# Altium PCB 9..11..13 filter.PcbDoc (part 2 of 2)
Units mil, origin at the board's own origin, x right, y up, seen from the top; angles counter-clockwise.
Board outline 3897.64 x 3897.64 mil, 2 copper layers (Top Layer, Bottom Layer); 210 components, 8 nets, 564 pads, 1454 vias.
Unrouted connection lines stored in the file: 121.
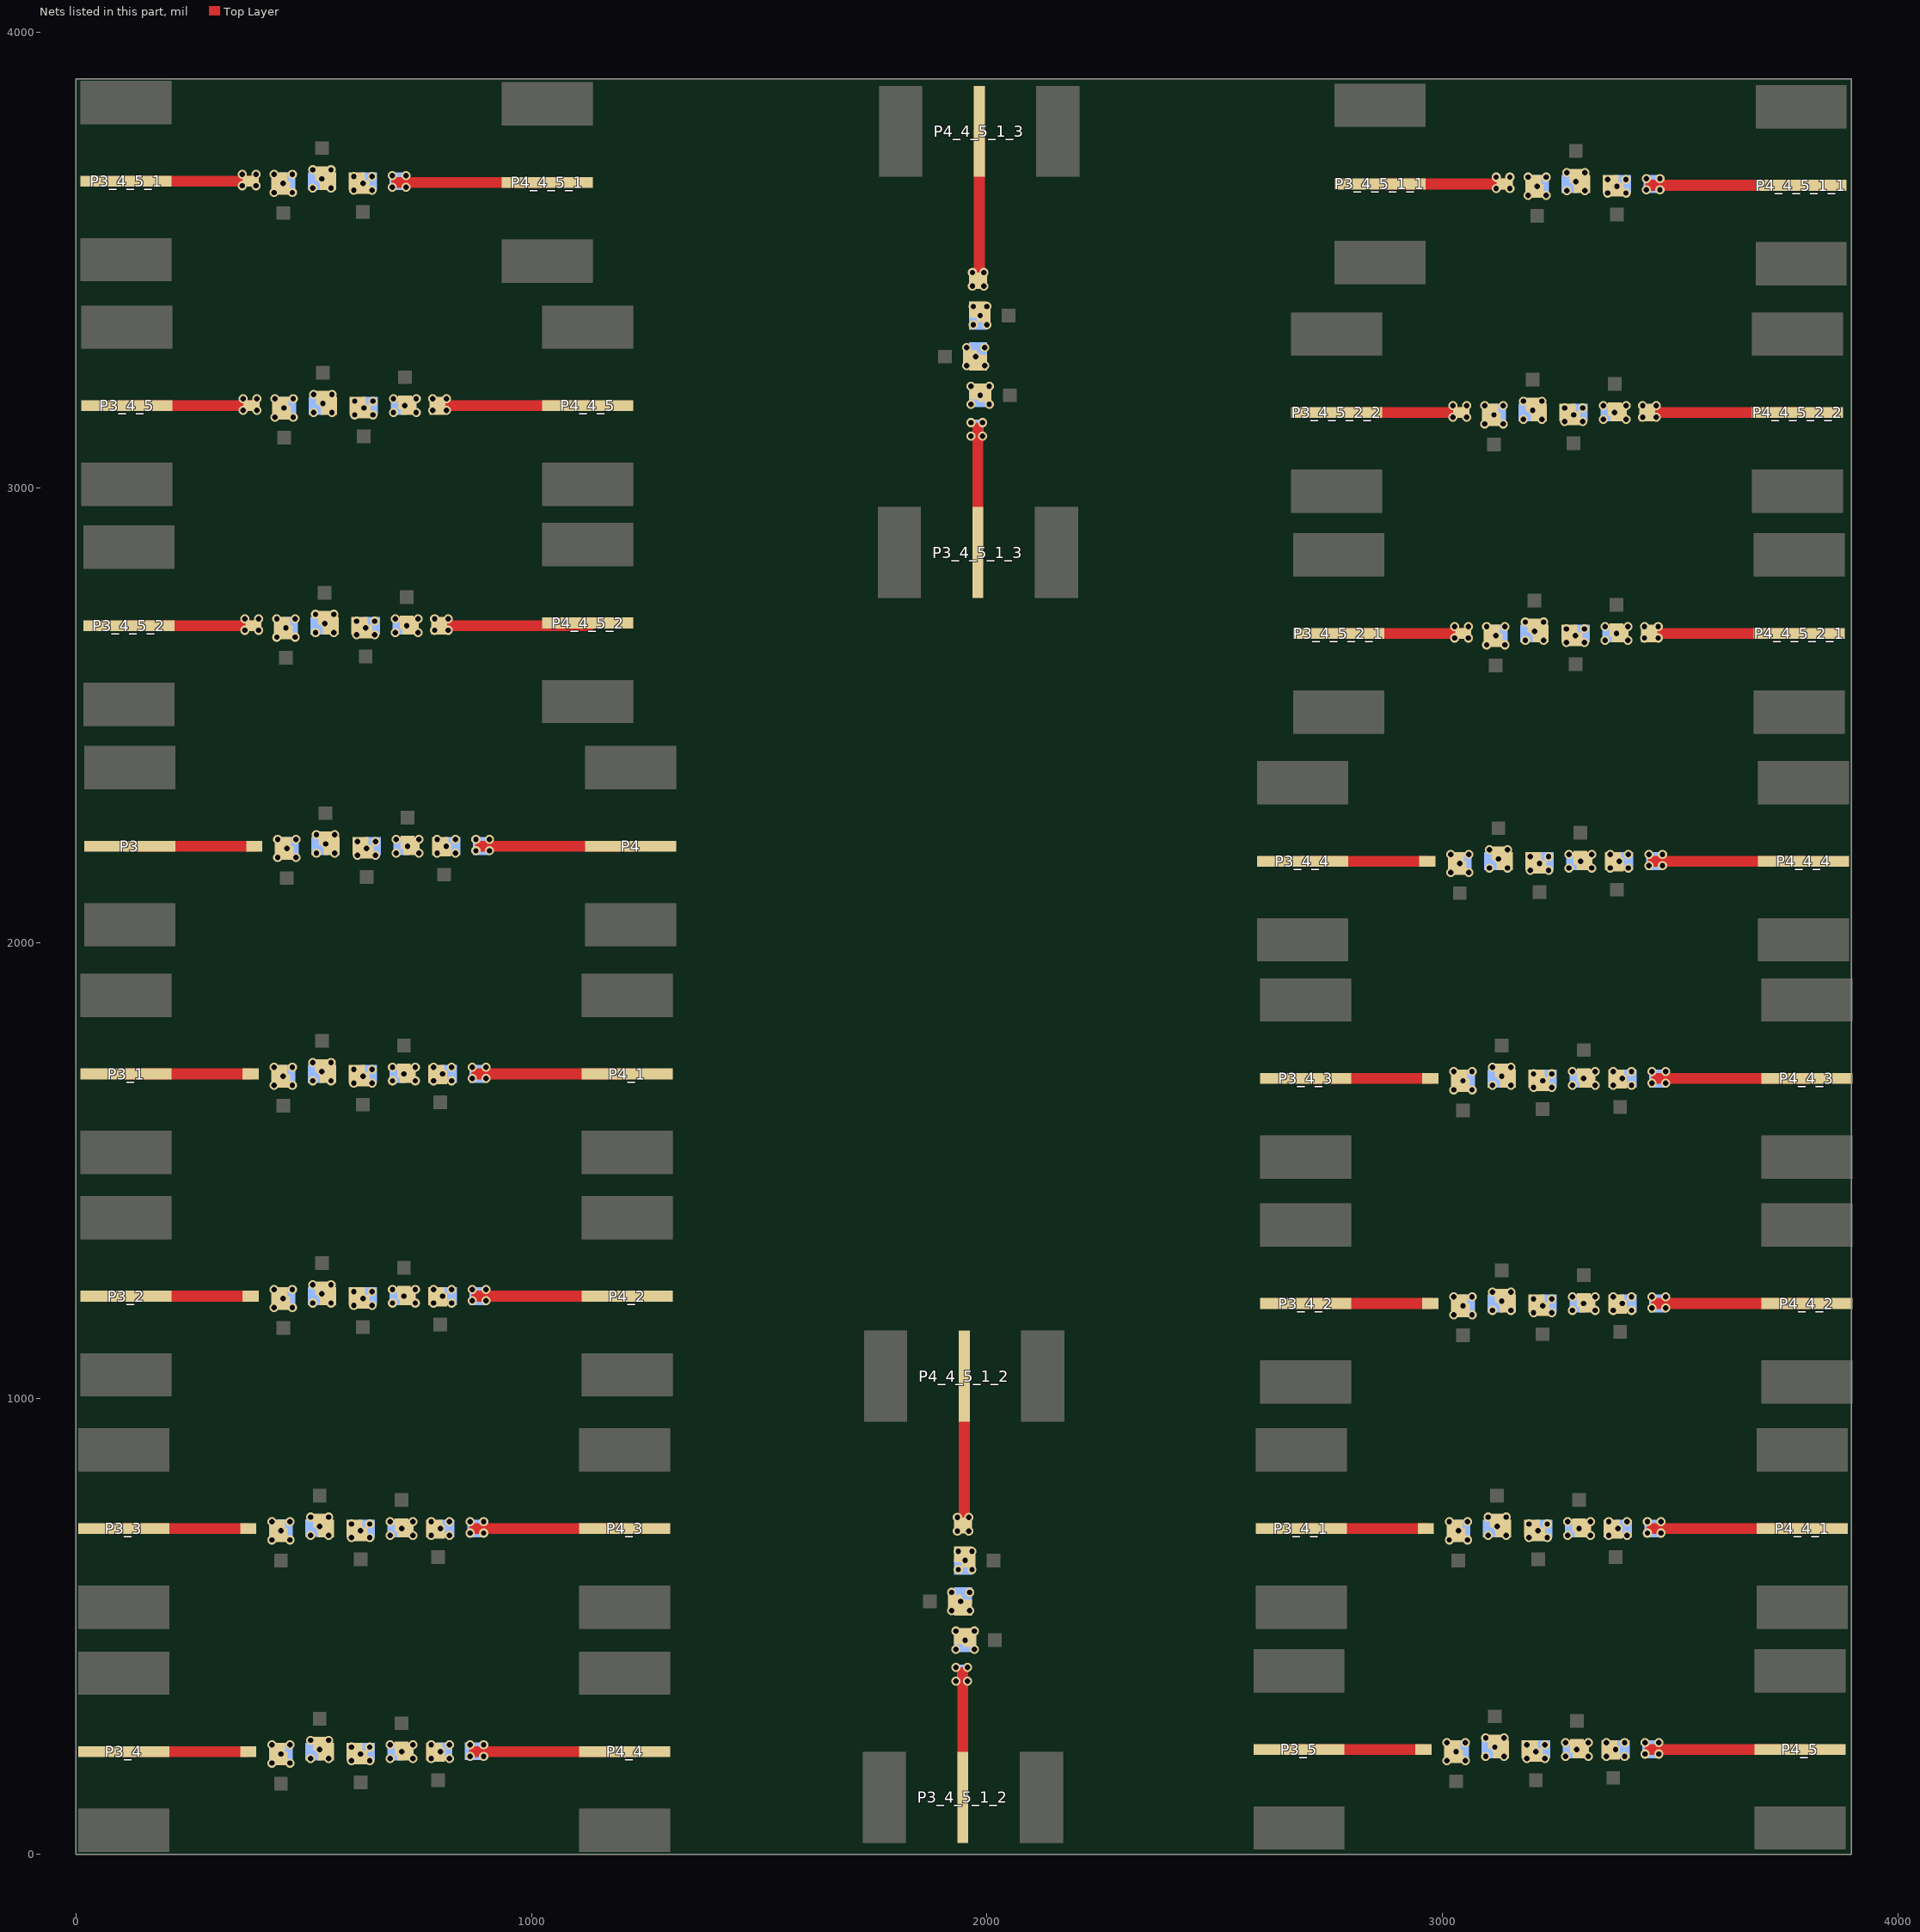
[diagram p2: the nets of this part, all layers, seen from the top]

## Via types
v1: diameter 20, hole 12, Top Layer to Bottom Layer, tented both sides, 1454 vias

## Nets (pads, with @x,y where several pads share a name; then routed paths per layer and width w, separated by ;. In a path a pad name is that pad's centre, name@x,y a point inside that pad or via, vN(x,y) a via of type N, cw(c..) or ccw(c..) an arc to the next point about the centre after c; other vN are vias at no path point) (continued)
NetC20_1: C20.1 C20_1.1 C20_2.1 C20_3.1 C20_4.1 C20_4_1.1 C20_4_2.1 C20_4_3.1 C20_4_4.1 C20_4_5.1 C20_4_5_1.1 C20_4_5_1_1.1 C20_4_5_1_2.1 C20_4_5_1_3.1 C20_4_5_2.1 C20_4_5_2_1.1 C20_4_5_2_2.1 C20_5.1 C23.2 C23_1.2 C23_2.2 C23_3.2 C23_4.2 C23_4_1.2 C23_4_2.2 C23_4_3.2 C23_4_4.2 C23_4_5.2 C23_4_5_1.2 C23_4_5_1_1.2 C23_4_5_1_2.2 C23_4_5_1_3.2 C23_4_5_2.2 C23_4_5_2_1.2 C23_4_5_2_2.2 C23_5.2 L9.2 L9_1.2 L9_2.2 L9_3.2 L9_4.2 L9_4_1.2 L9_4_2.2 L9_4_3.2 L9_4_4.2 L9_4_5.2 L9_4_5_1.2 L9_4_5_1_1.2 L9_4_5_1_2.2 L9_4_5_1_3.2 L9_4_5_2.2 L9_4_5_2_1.2 L9_4_5_2_2.2 L9_5.2
  other v1: 515,210 555,210 3095,215 3135,215 535,230 3115,235 515,250 555,250 3095,255 3135,255 1922.12,534.88 1962.12,534.88 1942.12,554.88 1922.12,574.88 1962.12,574.88 515,700 555,700 3100,700 3140,700 535,720 3120,720 515,740 555,740 3100,740 3140,740 3110,1194 3150,1194 520,1210 560,1210 3130,1214 540,1230 3110,1234 3150,1234 520,1250 560,1250 3110,1688 3150,1688 520,1698 560,1698 3130,1708 540,1718 3110,1728 3150,1728 520,1738 560,1738 3103,2165 3143,2165 3123,2185 528,2198 568,2198 3103,2205 3143,2205 548,2218 528,2238 568,2238 3182,2665 3222,2665 526,2682 566,2682 3202,2685 546,2702 3182,2705 3222,2705 526,2722 566,2722 3178,3150 3218,3150 522,3165 562,3165 3198,3170 542,3185 3178,3190 3218,3190 522,3205 562,3205 1955.12,3267.88 1995.12,3267.88 1975.12,3287.88 1955.12,3307.88 1995.12,3307.88 3272.88,3651.88 3312.88,3651.88 520,3658 560,3658 3292.88,3671.88 540,3678 3272.88,3691.88 3312.88,3691.88 520,3698 560,3698
NetC20_2: C20.2 C20_1.2 C20_2.2 C20_3.2 C20_4.2 C20_4_1.2 C20_4_2.2 C20_4_3.2 C20_4_4.2 C20_4_5.2 C20_4_5_1.2 C20_4_5_1_1.2 C20_4_5_1_2.2 C20_4_5_1_3.2 C20_4_5_2.2 C20_4_5_2_1.2 C20_4_5_2_2.2 C20_5.2 C21.1 C21_1.1 C21_2.1 C21_3.1 C21_4.1 C21_4_1.1 C21_4_2.1 C21_4_3.1 C21_4_4.1 C21_4_5.1 C21_4_5_1.1 C21_4_5_1_1.1 C21_4_5_1_2.1 C21_4_5_1_3.1 C21_4_5_2.1 C21_4_5_2_1.1 C21_4_5_2_2.1 C21_5.1 L10.2 L10_1.2 L10_2.2 L10_3.2 L10_4.2 L10_4_1.2 L10_4_2.2 L10_4_3.2 L10_4_4.2 L10_4_5.2 L10_4_5_1.2 L10_4_5_1_1.2 L10_4_5_1_2.2 L10_4_5_1_3.2 L10_4_5_2.2 L10_4_5_2_1.2 L10_4_5_2_2.2 L10_5.2
  other v1: 605,205 645,205 3185,210 3225,210 625,220 3205,225 605,235 645,235 3185,240 3225,240 1937.12,624.88 1967.12,624.88 1952.12,644.88 1937.12,664.88 1967.12,664.88 605,695 645,695 3190,695 3230,695 625,710 3210,710 605,725 645,725 3190,725 3230,725 3200,1189 3240,1189 3220,1204 610,1205 650,1205 3200,1219 3240,1219 630,1220 610,1235 650,1235 3200,1683 3240,1683 610,1693 650,1693 3220,1698 630,1708 3200,1713 3240,1713 610,1723 650,1723 3193,2160 3233,2160 3213,2175 3193,2190 3233,2190 618,2193 658,2193 638,2208 618,2223 658,2223 3272,2660 3312,2660 3292,2675 616,2677 656,2677 3272,2690 3312,2690 636,2692 616,2707 656,2707 3268,3145 3308,3145 612,3160 652,3160 3288,3160 632,3175 3268,3175 3308,3175 612,3190 652,3190 1970.12,3357.88 2000.12,3357.88 1985.12,3377.88 1970.12,3397.88 2000.12,3397.88 3362.88,3646.88 3402.88,3646.88 610,3653 650,3653 3382.88,3661.88 630,3668 3362.88,3676.88 3402.88,3676.88 610,3683 650,3683
NetC21_2: C21.2 C21_1.2 C21_2.2 C21_3.2 C21_4.2 C21_4_1.2 C21_4_2.2 C21_4_3.2 C21_4_4.2 C21_4_5.2 C21_4_5_1.2 C21_4_5_1_1.2 C21_4_5_1_2.2 C21_4_5_1_3.2 C21_4_5_2.2 C21_4_5_2_1.2 C21_4_5_2_2.2 C21_5.2 C22.1 C22_1.1 C22_2.1 C22_3.1 C22_4.1 C22_4_1.1 C22_4_2.1 C22_4_3.1 C22_4_4.1 C22_4_5.1 C22_4_5_1.1 C22_4_5_1_1.1 C22_4_5_1_2.1 C22_5.1 L11.2 L11_1.2 L11_2.2 L11_3.2 L11_4.2 L11_4_1.2 L11_4_2.2 L11_4_3.2 L11_4_4.2 L11_4_5.2 L11_4_5_1.2 L11_4_5_1_1.2 L11_4_5_1_2.2 L11_5.2
  other v1: 690,210 740,210 3270,215 3320,215 715,225 3295,230 690,240 740,240 3270,245 3320,245 690,700 740,700 3275,700 3325,700 715,715 3300,715 690,730 740,730 3275,730 3325,730 3285,1194 3335,1194 3310,1209 695,1210 745,1210 3285,1224 3335,1224 720,1225 695,1240 745,1240 3285,1688 3335,1688 695,1698 745,1698 3310,1703 720,1713 3285,1718 3335,1718 695,1728 745,1728 3278,2165 3328,2165 3303,2180 3278,2195 3328,2195 703,2198 753,2198 728,2213 703,2228 753,2228 3357,2665 3407,2665 3382,2680 701,2682 751,2682 3357,2695 3407,2695 726,2697 701,2712 751,2712 3353,3150 3403,3150 697,3165 747,3165 3378,3165 722,3180 3353,3180 3403,3180 697,3195 747,3195
NetC22_2: C22.2 C22_1.2 C22_2.2 C22_3.2 C22_4.2 C22_4_1.2 C22_4_2.2 C22_4_3.2 C22_4_4.2 C22_4_5.2 C22_4_5_1.2 C22_4_5_1_1.2 C22_4_5_1_2.2 C22_5.2 C24.1 C24_1.1 C24_2.1 C24_3.1 C24_4.1 C24_4_1.1 C24_4_2.1 C24_4_3.1 C24_4_4.1 C24_5.1 L12.2 L12_1.2 L12_2.2 L12_3.2 L12_4.2 L12_4_1.2 L12_4_2.2 L12_4_3.2 L12_4_4.2 L12_5.2
  other v1: 780,210 820,210 3360,215 3400,215 800,225 3380,230 780,240 820,240 3360,245 3400,245 780,700 820,700 3365,700 3405,700 800,715 3385,715 780,730 820,730 3365,730 3405,730 3375,1194 3415,1194 3395,1209 785,1210 825,1210 3375,1224 3415,1224 805,1225 785,1240 825,1240 3375,1688 3415,1688 785,1698 825,1698 3395,1703 805,1713 3375,1718 3415,1718 785,1728 825,1728 3368,2165 3408,2165 3388,2180 3368,2195 3408,2195 793,2198 833,2198 813,2213 793,2228 833,2228
NetC23_1: C23.1 C23_1.1 C23_2.1 C23_3.1 C23_4.1 C23_4_1.1 C23_4_2.1 C23_4_3.1 C23_4_4.1 C23_4_5.1 C23_4_5_1.1 C23_4_5_1_1.1 C23_4_5_1_2.1 C23_4_5_1_3.1 C23_4_5_2.1 C23_4_5_2_1.1 C23_4_5_2_2.1 C23_5.1 C25.2 C25_1.2 C25_2.2 C25_3.2 C25_4.2 C25_4_1.2 C25_4_2.2 C25_4_3.2 C25_4_4.2 C25_4_5.2 C25_4_5_1.2 C25_4_5_1_1.2 C25_4_5_1_2.2 C25_4_5_1_3.2 C25_4_5_2.2 C25_4_5_2_1.2 C25_4_5_2_2.2 C25_5.2 L13.2 L13_1.2 L13_2.2 L13_3.2 L13_4.2 L13_4_1.2 L13_4_2.2 L13_4_3.2 L13_4_4.2 L13_4_5.2 L13_4_5_1.2 L13_4_5_1_1.2 L13_4_5_1_2.2 L13_4_5_1_3.2 L13_4_5_2.2 L13_4_5_2_1.2 L13_4_5_2_2.2 L13_5.2
  other v1: 430,200 470,200 3010,205 3050,205 450,220 3030,225 430,240 470,240 3010,245 3050,245 1932.12,449.88 1972.12,449.88 1952.12,469.88 1932.12,489.88 1972.12,489.88 430,690 470,690 3015,690 3055,690 450,710 3035,710 430,730 470,730 3015,730 3055,730 3025,1184 3065,1184 435,1200 475,1200 3045,1204 455,1220 3025,1224 3065,1224 435,1240 475,1240 3025,1678 3065,1678 435,1688 475,1688 3045,1698 455,1708 3025,1718 3065,1718 435,1728 475,1728 3018,2155 3058,2155 3038,2175 443,2188 483,2188 3018,2195 3058,2195 463,2208 443,2228 483,2228 3097,2655 3137,2655 441,2672 481,2672 3117,2675 461,2692 3097,2695 3137,2695 441,2712 481,2712 3093,3140 3133,3140 437,3155 477,3155 3113,3160 457,3175 3093,3180 3133,3180 1965.12,3182.88 2005.12,3182.88 437,3195 477,3195 1985.12,3202.88 1965.12,3222.88 2005.12,3222.88 3187.88,3641.88 3227.88,3641.88 435,3648 475,3648 3207.88,3661.88 455,3668 3187.88,3681.88 3227.88,3681.88 435,3688 475,3688
NetC24_2: C24.2 C24_1.2 C24_2.2 C24_3.2 C24_4.2 C24_4_1.2 C24_4_2.2 C24_4_3.2 C24_4_4.2 C24_5.2 P4.1 P4_1.1 P4_2.1 P4_3.1 P4_4.1 P4_4_1.1 P4_4_2.1 P4_4_3.1 P4_4_4.1 P4_4_5.1 P4_4_5_1.1 P4_4_5_1_1.1 P4_4_5_1_2.1 P4_4_5_1_3.1 P4_4_5_2.1 P4_4_5_2_1.1 P4_4_5_2_2.1 P4_5.1 | length 5940
  Top Layer w24: 704.5,3670 P4_4_5_1.1@1034.5,3670 ; 793.5,3180 P4_4_5.1@1123.5,3180 ; 797.5,2697 P4_4_5_2.1@1127.5,2697 ; 875,225 P4_4.1@1205,225 ; 875,715 P4_3.1@1205,715 ; 880,1225 P4_2.1@1210,1225 ; 880,1713 P4_1.1@1210,1713 ; 888,2213 P4.1@1218,2213 ; 1950.12,719.37 P4_4_5_1_2.1@1950.12,1049.37 ; 1983.12,3452.37 P4_4_5_1_3.1@1983.12,3782.37 ; 3449.5,3165 P4_4_5_2_2.1@3779.5,3165 ; 3453.5,2680 P4_4_5_2_1.1@3783.5,2680 ; 3455,230 P4_5.1@3785,230 ; 3457.37,3663.88 P4_4_5_1_1.1@3787.37,3663.88 ; 3460,715 P4_4_1.1@3790,715 ; 3463,2180 P4_4_4.1@3793,2180 ; 3470,1209 P4_4_2.1@3800,1209 ; 3470,1703 P4_4_3.1@3800,1703
  other v1: 865,215 895,215 3445,220 3475,220 865,240 895,240 3445,245 3475,245 865,705 895,705 3450,705 3480,705 1935.12,709.37 1960.12,709.37 865,730 895,730 3450,730 3480,730 1935.12,739.37 1960.12,739.37 3460,1199 3490,1199 870,1215 900,1215 3460,1224 3490,1224 870,1240 900,1240 3460,1693 3490,1693 870,1703 900,1703 3460,1718 3490,1718 870,1728 900,1728 3453,2170 3483,2170 3453,2195 3483,2195 878,2203 908,2203 878,2228 908,2228 3443.5,2670 3473.5,2670 787.5,2687 817.5,2687 3443.5,2695 3473.5,2695 787.5,2712 817.5,2712 3439.5,3155 3469.5,3155 783.5,3170 813.5,3170 3439.5,3180 3469.5,3180 783.5,3195 813.5,3195 1968.12,3442.37 1993.12,3442.37 1968.12,3472.37 1993.12,3472.37 3447.37,3653.88 3477.37,3653.88 694.5,3660 724.5,3660 3447.37,3678.88 3477.37,3678.88 694.5,3685 724.5,3685
NetC25_1: C25.1 C25_1.1 C25_2.1 C25_3.1 C25_4.1 C25_4_1.1 C25_4_2.1 C25_4_3.1 C25_4_4.1 C25_4_5.1 C25_4_5_1.1 C25_4_5_1_1.1 C25_4_5_1_2.1 C25_4_5_1_3.1 C25_4_5_2.1 C25_4_5_2_1.1 C25_4_5_2_2.1 C25_5.1 P3.1 P3_1.1 P3_2.1 P3_3.1 P3_4.1 P3_4_1.1 P3_4_2.1 P3_4_3.1 P3_4_4.1 P3_4_5.1 P3_4_5_1.1 P3_4_5_1_1.1 P3_4_5_1_2.1 P3_4_5_1_3.1 P3_4_5_2.1 P3_4_5_2_1.1 P3_4_5_2_2.1 P3_5.1 | length 4923.1
  Top Layer w24: P3_4.1@105,225 C25_4.1@378.5,225 ; P3_3.1@105,715 C25_3.1@378.5,715 ; P3_2.1@110,1225 C25_2.1@383.5,1225 ; P3_1.1@110,1713 C25_1.1@383.5,1713 ; P3_4_5_1.1@110,3673 C25_4_5_1.1@383.5,3673 ; P3_4_5.1@112,3180 C25_4_5.1@385.5,3180 ; P3_4_5_2.1@116,2697 371,2697 C25_4_5_2.1@389.5,2697 ; P3.1@118,2213 C25.1@391.5,2213 ; P3_4_5_1_2.1@1947.12,124.88 1947.12,398.38 ; P3_4_5_1_3.1@1980.12,2857.88 1980.12,3131.38 ; P3_5.1@2685,230 C25_5.1@2958.5,230 ; P3_4_1.1@2690,715 C25_4_1.1@2963.5,715 ; P3_4_4.1@2693,2180 C25_4_4.1@2966.5,2180 ; P3_4_2.1@2700,1209 C25_4_2.1@2973.5,1209 ; P3_4_3.1@2700,1703 C25_4_3.1@2973.5,1703 ; P3_4_5_2_2.1@2768,3165 C25_4_5_2_2.1@3041.5,3165 ; P3_4_5_2_1.1@2772,2680 C25_4_5_2_1.1@3045.5,2680 ; P3_4_5_1_1.1@2862.88,3666.88 3117.88,3666.88 C25_4_5_1_1.1@3136.38,3666.88
  other v1: 1932.12,379.88 1957.12,379.88 1932.12,409.88 1957.12,409.88 3027,2670 3057,2670 371,2687 401,2687 3027,2695 3057,2695 371,2712 401,2712 1965.12,3112.88 1990.12,3112.88 1965.12,3142.88 1990.12,3142.88 3023,3155 3053,3155 367,3170 397,3170 3023,3180 3053,3180 367,3195 397,3195 3117.88,3656.88 3147.88,3656.88 365,3663 395,3663 3117.88,3681.88 3147.88,3681.88 365,3688 395,3688

## Polygon pours and split planes (outlines as drawn)
GND on Bottom Layer "Bottom Layer-GND" (solid, remove dead copper, pour order 62): 1757.12,2755.88 2200.12,2755.88 ccw(c2200.12,2756.88) 2201.12,2756.88 2201.12,3882.88 cw(c2204.12,3882.88) 2204.12,3885.88 1762.12,3885.88 ccw(c1762.12,3884.88) 1761.12,3884.88
GND on Bottom Layer "Bottom Layer-GND 1" (solid, remove dead copper, pour order 60): 1724.12,22.88 2167.12,22.88 ccw(c2167.12,23.88) 2168.12,23.88 2168.12,1149.88 cw(c2171.12,1149.88) 2171.12,1152.88 1729.12,1152.88 ccw(c1729.12,1151.88) 1728.12,1151.88
GND on Bottom Layer "Bottom Layer-GND 2" (solid, remove dead copper, pour order 58): 2760.88,3889.88 2760.88,3446.88 ccw(c2761.88,3446.88) 2761.88,3445.88 3887.88,3445.88 cw(c3887.88,3442.88) 3890.88,3442.88 3890.88,3884.88 ccw(c3889.88,3884.88) 3889.88,3885.88
GND on Bottom Layer "Top Layer-No Net" (solid, pour order 56): 2668,3384 3878,3384 3881,2944 2668,2944
GND on Bottom Layer "Top Layer-No Net" (solid, pour order 54): 2672,2899 3882,2899 3885,2459 2672,2459
GND on Bottom Layer "Top Layer-No Net" (solid, pour order 52): 16,2916 1226,2916 1229,2476 16,2476
GND on Bottom Layer "Bottom Layer-GND 3" (solid, remove dead copper, pour order 50): 8,3896 8,3453 ccw(c9,3453) 9,3452 1135,3452 cw(c1135,3449) 1138,3449 1138,3891 ccw(c1137,3891) 1137,3892
GND on Bottom Layer "Top Layer-No Net" (solid, pour order 48): 12,3399 1222,3399 1225,2959 12,2959
GND on Bottom Layer "Top Layer-No Net" (solid, pour order 46): 2588,2405 3898,2405 3898,1955 2588,1955
GND on Bottom Layer "Top Layer-No Net" (solid, pour order 44): 2595,1928 3905,1928 3905,1478 2595,1478
GND on Bottom Layer "Top Layer-No Net" (solid, pour order 42): 2595,1434 3905,1434 3905,984 2595,984
GND on Bottom Layer "Top Layer-No Net" (solid, pour order 40): 2585,940 3895,940 3895,490 2585,490
GND on Bottom Layer "Top Layer-No Net" (solid, pour order 30): 2580,455 3890,455 3890,5 2580,5
GND on Bottom Layer "Top Layer-No Net" (solid, pour order 28): 0,450 1310,450 1310,0 0,0
GND on Bottom Layer "Top Layer-No Net" (solid, pour order 26): 0,940 1310,940 1310,490 0,490
GND on Bottom Layer "Top Layer-No Net" (solid, pour order 24): 5,1450 1315,1450 1315,1000 5,1000
GND on Bottom Layer "Top Layer-No Net" (solid, pour order 22): 5,1938 1315,1938 1315,1488 5,1488
GND on Bottom Layer "Top Layer-No Net" (solid, pour order 0): 13,2438 1323,2438 1323,1988 13,1988

## Keep-outs
Keep-Out Layer:
  the board outline again, w10

## Other copper
Top Layer:
  region net NetC25_1: 2000.12,3102.88 2000.12,3152.88 1955.12,3152.88 1955.12,3102.88
  region net GND: 2075.12,3352.88 2075.12,3402.88 2035.12,3402.88 2035.12,3352.88
  region net GND: 1920.12,3267.88 1920.12,3307.88 1885.12,3307.88 1885.12,3267.88
  region net GND: 2070.12,3182.88 2070.12,3222.88 2035.12,3222.88 2035.12,3182.88
  region net NetC20_2: 2010.12,3347.88 2010.12,3407.88 1960.12,3407.88 1960.12,3347.88
  region: 2005.12,3257.88 2005.12,3317.88 1945.12,3317.88 1945.12,3257.88
  region net NetC23_1: 2015.12,3172.88 2015.12,3232.88 1955.12,3232.88 1955.12,3172.88
  region net NetC24_2: 2003.12,3432.37 2003.12,3482.37 1958.12,3482.37 1958.12,3432.37
  region net NetC25_1: 1967.12,369.88 1967.12,419.88 1922.12,419.88 1922.12,369.88
  region net GND: 2042.12,619.88 2042.12,669.88 2002.12,669.88 2002.12,619.88
  region net GND: 1887.12,534.88 1887.12,574.88 1852.12,574.88 1852.12,534.88
  region net GND: 2037.12,449.88 2037.12,489.88 2002.12,489.88 2002.12,449.88
  region net NetC20_2: 1977.12,614.88 1977.12,674.88 1927.12,674.88 1927.12,614.88
  region: 1972.12,524.88 1972.12,584.88 1912.12,584.88 1912.12,524.88
  region net NetC23_1: 1982.12,439.88 1982.12,499.88 1922.12,499.88 1922.12,439.88
  region net NetC24_2: 1970.12,699.37 1970.12,749.37 1925.12,749.37 1925.12,699.37
  rectangle net NetC25_1: 3107.88,3646.88 3157.88,3691.88
  rectangle net GND: 3357.88,3571.88 3407.88,3611.88
  rectangle net GND: 3272.88,3726.88 3312.88,3761.88
  rectangle net GND: 3187.88,3576.88 3227.88,3611.88
  rectangle net NetC20_2: 3352.88,3636.88 3412.88,3686.88
  rectangle: 3262.88,3641.88 3322.88,3701.88
  rectangle net NetC23_1: 3177.88,3631.88 3237.88,3691.88
  rectangle net NetC24_2: 3437.37,3643.88 3487.37,3688.88
  rectangle net NetC25_1: 3013,3145 3063,3190
  rectangle net GND: 3353,3215 3403,3255
  rectangle net GND: 3263,3070 3313,3110
  rectangle net GND: 3178,3225 3218,3260
  rectangle net GND: 3093,3075 3133,3110
  rectangle net NetC21_2: 3343,3140 3408,3190
  rectangle net NetC20_2: 3258,3135 3318,3185
  rectangle: 3168,3140 3228,3200
  rectangle net NetC23_1: 3083,3130 3143,3190
  rectangle net NetC24_2: 3429.5,3145 3479.5,3190
  rectangle net NetC25_1: 3017,2660 3067,2705
  rectangle net GND: 3357,2730 3407,2770
  rectangle net GND: 3267,2585 3317,2625
  rectangle net GND: 3182,2740 3222,2775
  rectangle net GND: 3097,2590 3137,2625
  rectangle net NetC21_2: 3347,2655 3412,2705
  rectangle net NetC20_2: 3262,2650 3322,2700
  rectangle: 3172,2655 3232,2715
  rectangle net NetC23_1: 3087,2645 3147,2705
  rectangle net NetC24_2: 3433.5,2660 3483.5,2705
  rectangle net NetC24_2: 777.5,2677 827.5,2722
  rectangle net NetC23_1: 431,2662 491,2722
  rectangle: 516,2672 576,2732
  rectangle net NetC20_2: 606,2667 666,2717
  rectangle net NetC21_2: 691,2672 756,2722
  rectangle net GND: 441,2607 481,2642
  rectangle net GND: 526,2757 566,2792
  rectangle net GND: 611,2602 661,2642
  rectangle net GND: 701,2747 751,2787
  rectangle net NetC25_1: 361,2677 411,2722
  rectangle net NetC24_2: 684.5,3650 734.5,3695
  rectangle net NetC23_1: 425,3638 485,3698
  rectangle: 510,3648 570,3708
  rectangle net NetC20_2: 600,3643 660,3693
  rectangle net GND: 435,3583 475,3618
  rectangle net GND: 520,3733 560,3768
  rectangle net GND: 605,3578 655,3618
  rectangle net NetC25_1: 355,3653 405,3698
  rectangle net NetC25_1: 357,3160 407,3205
  rectangle net GND: 697,3230 747,3270
  rectangle net GND: 607,3085 657,3125
  rectangle net GND: 522,3240 562,3275
  rectangle net GND: 437,3090 477,3125
  rectangle net NetC21_2: 687,3155 752,3205
  rectangle net NetC20_2: 602,3150 662,3200
  rectangle: 512,3155 572,3215
  rectangle net NetC23_1: 427,3145 487,3205
  rectangle net NetC24_2: 773.5,3160 823.5,3205
  rectangle net GND: 3363,2090 3403,2130
  rectangle net GND: 3278,2230 3328,2270
  rectangle net GND: 3188,2085 3238,2125
  rectangle net GND: 3103,2240 3143,2275
  rectangle net GND: 3018,2090 3058,2125
  rectangle net NetC22_2: 3353,2155 3423,2205
  rectangle net NetC21_2: 3268,2155 3333,2205
  rectangle net NetC20_2: 3183,2150 3243,2200
  rectangle: 3093,2155 3153,2215
  rectangle net NetC23_1: 3008,2145 3068,2205
  rectangle net NetC24_2: 3443,2160 3493,2205
  rectangle net GND: 3370,1613 3410,1653
  rectangle net GND: 3285,1753 3335,1793
  rectangle net GND: 3195,1608 3245,1648
  rectangle net GND: 3110,1763 3150,1798
  rectangle net GND: 3025,1613 3065,1648
  rectangle net NetC22_2: 3360,1678 3430,1728
  rectangle net NetC21_2: 3275,1678 3340,1728
  rectangle net NetC20_2: 3190,1673 3250,1723
  rectangle: 3100,1678 3160,1738
  rectangle net NetC23_1: 3015,1668 3075,1728
  rectangle net NetC24_2: 3450,1683 3500,1728
  rectangle net GND: 3370,1119 3410,1159
  rectangle net GND: 3285,1259 3335,1299
  rectangle net GND: 3195,1114 3245,1154
  rectangle net GND: 3110,1269 3150,1304
  rectangle net GND: 3025,1119 3065,1154
  rectangle net NetC22_2: 3360,1184 3430,1234
  rectangle net NetC21_2: 3275,1184 3340,1234
  rectangle net NetC20_2: 3190,1179 3250,1229
  rectangle: 3100,1184 3160,1244
  rectangle net NetC23_1: 3015,1174 3075,1234
  rectangle net NetC24_2: 3450,1189 3500,1234
  rectangle net GND: 3360,625 3400,665
  rectangle net GND: 3275,765 3325,805
  rectangle net GND: 3185,620 3235,660
  rectangle net GND: 3100,775 3140,810
  rectangle net GND: 3015,625 3055,660
  rectangle net NetC22_2: 3350,690 3420,740
  rectangle net NetC21_2: 3265,690 3330,740
  rectangle net NetC20_2: 3180,685 3240,735
  rectangle: 3090,690 3150,750
  rectangle net NetC23_1: 3005,680 3065,740
  rectangle net NetC24_2: 3440,695 3490,740
  rectangle net NetC24_2: 3435,210 3485,255
  rectangle net NetC23_1: 3000,195 3060,255
  rectangle: 3085,205 3145,265
  rectangle net NetC20_2: 3175,200 3235,250
  rectangle net NetC21_2: 3260,205 3325,255
  rectangle net NetC22_2: 3345,205 3415,255
  rectangle net GND: 3010,140 3050,175
  rectangle net GND: 3095,290 3135,325
  rectangle net GND: 3180,135 3230,175
  rectangle net GND: 3270,280 3320,320
  rectangle net GND: 3355,140 3395,180
  rectangle net NetC24_2: 855,205 905,250
  rectangle net NetC23_1: 420,190 480,250
  rectangle: 505,200 565,260
  rectangle net NetC20_2: 595,195 655,245
  rectangle net NetC21_2: 680,200 745,250
  rectangle net NetC22_2: 765,200 835,250
  rectangle net GND: 430,135 470,170
  rectangle net GND: 515,285 555,320
  rectangle net GND: 600,130 650,170
  rectangle net GND: 690,275 740,315
  rectangle net GND: 775,135 815,175
  rectangle net NetC24_2: 855,695 905,740
  rectangle net NetC23_1: 420,680 480,740
  rectangle: 505,690 565,750
  rectangle net NetC20_2: 595,685 655,735
  rectangle net NetC21_2: 680,690 745,740
  rectangle net NetC22_2: 765,690 835,740
  rectangle net GND: 430,625 470,660
  rectangle net GND: 515,775 555,810
  rectangle net GND: 600,620 650,660
  rectangle net GND: 690,765 740,805
  rectangle net GND: 775,625 815,665
  rectangle net NetC24_2: 860,1205 910,1250
  rectangle net NetC23_1: 425,1190 485,1250
  rectangle: 510,1200 570,1260
  rectangle net NetC20_2: 600,1195 660,1245
  rectangle net NetC21_2: 685,1200 750,1250
  rectangle net NetC22_2: 770,1200 840,1250
  rectangle net GND: 435,1135 475,1170
  rectangle net GND: 520,1285 560,1320
  rectangle net GND: 605,1130 655,1170
  rectangle net GND: 695,1275 745,1315
  rectangle net GND: 780,1135 820,1175
  rectangle net NetC24_2: 860,1693 910,1738
  rectangle net NetC23_1: 425,1678 485,1738
  rectangle: 510,1688 570,1748
  rectangle net NetC20_2: 600,1683 660,1733
  rectangle net NetC21_2: 685,1688 750,1738
  rectangle net NetC22_2: 770,1688 840,1738
  rectangle net GND: 435,1623 475,1658
  rectangle net GND: 520,1773 560,1808
  rectangle net GND: 605,1618 655,1658
  rectangle net GND: 695,1763 745,1803
  rectangle net GND: 780,1623 820,1663
  rectangle net GND: 788,2123 828,2163
  rectangle net GND: 703,2263 753,2303
  rectangle net GND: 613,2118 663,2158
  rectangle net GND: 528,2273 568,2308
  rectangle net GND: 443,2123 483,2158
  rectangle net NetC22_2: 778,2188 848,2238
  rectangle net NetC21_2: 693,2188 758,2238
  rectangle net NetC20_2: 608,2183 668,2233
  rectangle: 518,2188 578,2248
  rectangle net NetC23_1: 433,2178 493,2238
  rectangle net NetC24_2: 868,2193 918,2238
Bottom Layer:
  region: 2000.12,3102.88 2000.12,3152.88 1955.12,3152.88 1955.12,3102.88
  region net NetC24_2: 2003.12,3432.37 2003.12,3482.37 1958.12,3482.37 1958.12,3432.37
  region net NetC20_2: 2010.12,3347.88 2010.12,3407.88 1960.12,3407.88 1960.12,3347.88
  region net NetC20_1: 2005.12,3257.88 2005.12,3317.88 1945.12,3317.88 1945.12,3257.88
  region net NetC23_1: 2015.12,3172.88 2015.12,3232.88 1955.12,3232.88 1955.12,3172.88
  region: 1967.12,369.88 1967.12,419.88 1922.12,419.88 1922.12,369.88
  region net NetC24_2: 1970.12,699.37 1970.12,749.37 1925.12,749.37 1925.12,699.37
  region net NetC20_2: 1977.12,614.88 1977.12,674.88 1927.12,674.88 1927.12,614.88
  region net NetC20_1: 1972.12,524.88 1972.12,584.88 1912.12,584.88 1912.12,524.88
  region net NetC23_1: 1982.12,439.88 1982.12,499.88 1922.12,499.88 1922.12,439.88
  rectangle: 3107.88,3646.88 3157.88,3691.88
  rectangle net NetC24_2: 3437.37,3643.88 3487.37,3688.88
  rectangle net NetC20_2: 3352.88,3636.88 3412.88,3686.88
  rectangle net NetC20_1: 3262.88,3641.88 3322.88,3701.88
  rectangle net NetC23_1: 3177.88,3631.88 3237.88,3691.88
  rectangle: 3013,3145 3063,3190
  rectangle net NetC24_2: 3429.5,3145 3479.5,3190
  rectangle net NetC21_2: 3343,3140 3413,3190
  rectangle net NetC20_2: 3258,3135 3318,3185
  rectangle net NetC20_1: 3168,3140 3228,3200
  rectangle net NetC23_1: 3083,3130 3143,3190
  rectangle: 3017,2660 3067,2705
  rectangle net NetC24_2: 3433.5,2660 3483.5,2705
  rectangle net NetC21_2: 3347,2655 3417,2705
  rectangle net NetC20_2: 3262,2650 3322,2700
  rectangle net NetC20_1: 3172,2655 3232,2715
  rectangle net NetC23_1: 3087,2645 3147,2705
  rectangle net NetC23_1: 431,2662 491,2722
  rectangle net NetC20_1: 516,2672 576,2732
  rectangle net NetC20_2: 606,2667 666,2717
  rectangle net NetC21_2: 691,2672 761,2722
  rectangle net NetC24_2: 777.5,2677 827.5,2722
  rectangle: 361,2677 411,2722
  rectangle net NetC23_1: 425,3638 485,3698
  rectangle net NetC20_1: 510,3648 570,3708
  rectangle net NetC20_2: 600,3643 660,3693
  rectangle net NetC24_2: 684.5,3650 734.5,3695
  rectangle: 355,3653 405,3698
  rectangle: 357,3160 407,3205
  rectangle net NetC24_2: 773.5,3160 823.5,3205
  rectangle net NetC21_2: 687,3155 757,3205
  rectangle net NetC20_2: 602,3150 662,3200
  rectangle net NetC20_1: 512,3155 572,3215
  rectangle net NetC23_1: 427,3145 487,3205
  rectangle net NetC24_2: 3443,2160 3493,2205
  rectangle net NetC22_2: 3358,2155 3418,2205
  rectangle net NetC21_2: 3268,2155 3338,2205
  rectangle net NetC20_2: 3183,2150 3243,2200
  rectangle net NetC20_1: 3093,2155 3153,2215
  rectangle net NetC23_1: 3008,2145 3068,2205
  rectangle net NetC24_2: 3450,1683 3500,1728
  rectangle net NetC22_2: 3365,1678 3425,1728
  rectangle net NetC21_2: 3275,1678 3345,1728
  rectangle net NetC20_2: 3190,1673 3250,1723
  rectangle net NetC20_1: 3100,1678 3160,1738
  rectangle net NetC23_1: 3015,1668 3075,1728
  rectangle net NetC24_2: 3450,1189 3500,1234
  rectangle net NetC22_2: 3365,1184 3425,1234
  rectangle net NetC21_2: 3275,1184 3345,1234
  rectangle net NetC20_2: 3190,1179 3250,1229
  rectangle net NetC20_1: 3100,1184 3160,1244
  rectangle net NetC23_1: 3015,1174 3075,1234
  rectangle net NetC24_2: 3440,695 3490,740
  rectangle net NetC22_2: 3355,690 3415,740
  rectangle net NetC21_2: 3265,690 3335,740
  rectangle net NetC20_2: 3180,685 3240,735
  rectangle net NetC20_1: 3090,690 3150,750
  rectangle net NetC23_1: 3005,680 3065,740
  rectangle net NetC23_1: 3000,195 3060,255
  rectangle net NetC20_1: 3085,205 3145,265
  rectangle net NetC20_2: 3175,200 3235,250
  rectangle net NetC21_2: 3260,205 3330,255
  rectangle net NetC22_2: 3350,205 3410,255
  rectangle net NetC24_2: 3435,210 3485,255
  rectangle net NetC23_1: 420,190 480,250
  rectangle net NetC20_1: 505,200 565,260
  rectangle net NetC20_2: 595,195 655,245
  rectangle net NetC21_2: 680,200 750,250
  rectangle net NetC22_2: 770,200 830,250
  rectangle net NetC24_2: 855,205 905,250
  rectangle net NetC23_1: 420,680 480,740
  rectangle net NetC20_1: 505,690 565,750
  rectangle net NetC20_2: 595,685 655,735
  rectangle net NetC21_2: 680,690 750,740
  rectangle net NetC22_2: 770,690 830,740
  rectangle net NetC24_2: 855,695 905,740
  rectangle net NetC23_1: 425,1190 485,1250
  rectangle net NetC20_1: 510,1200 570,1260
  rectangle net NetC20_2: 600,1195 660,1245
  rectangle net NetC21_2: 685,1200 755,1250
  rectangle net NetC22_2: 775,1200 835,1250
  rectangle net NetC24_2: 860,1205 910,1250
  rectangle net NetC23_1: 425,1678 485,1738
  rectangle net NetC20_1: 510,1688 570,1748
  rectangle net NetC20_2: 600,1683 660,1733
  rectangle net NetC21_2: 685,1688 755,1738
  rectangle net NetC22_2: 775,1688 835,1738
  rectangle net NetC24_2: 860,1693 910,1738
  rectangle net NetC24_2: 868,2193 918,2238
  rectangle net NetC22_2: 783,2188 843,2238
  rectangle net NetC21_2: 693,2188 763,2238
  rectangle net NetC20_2: 608,2183 668,2233
  rectangle net NetC20_1: 518,2188 578,2248
  rectangle net NetC23_1: 433,2178 493,2238

## Silkscreen, mask and mechanical layers (free items; w line width, h text height)
Top Overlay:
  text "Filter" at 1792,2014 h60
Top Solder:
  region: 2103.12,2961.88 2103.12,3678.88 1858.12,3678.88 1858.12,2961.88
  region: 2070.12,228.88 2070.12,945.88 1825.12,945.88 1825.12,228.88
  rectangle: 2966.88,3543.88 3683.88,3788.88
  rectangle: 2872,3039 3675,3291
  rectangle: 2876,2554 3679,2806
  rectangle: 220,2571 1023,2823
  rectangle: 214,3550 931,3795
  rectangle: 216,3054 1019,3306
  rectangle: 2793,2060 3688,2300
  rectangle: 2800,1583 3695,1823
  rectangle: 2800,1089 3695,1329
  rectangle: 2790,595 3685,835
  rectangle: 2785,110 3680,350
  rectangle: 205,105 1100,345
  rectangle: 205,595 1100,835
  rectangle: 210,1105 1105,1345
  rectangle: 210,1593 1105,1833
  rectangle: 218,2093 1113,2333